# Altium PCB PCB.PcbDoc
Units mm, origin at the board's own origin, x right, y up, seen from the top; angles counter-clockwise.
Board outline 50 x 31 mm, 2 copper layers (Top Layer, Bottom Layer); 56 components, 45 nets, 245 pads, 26 vias.
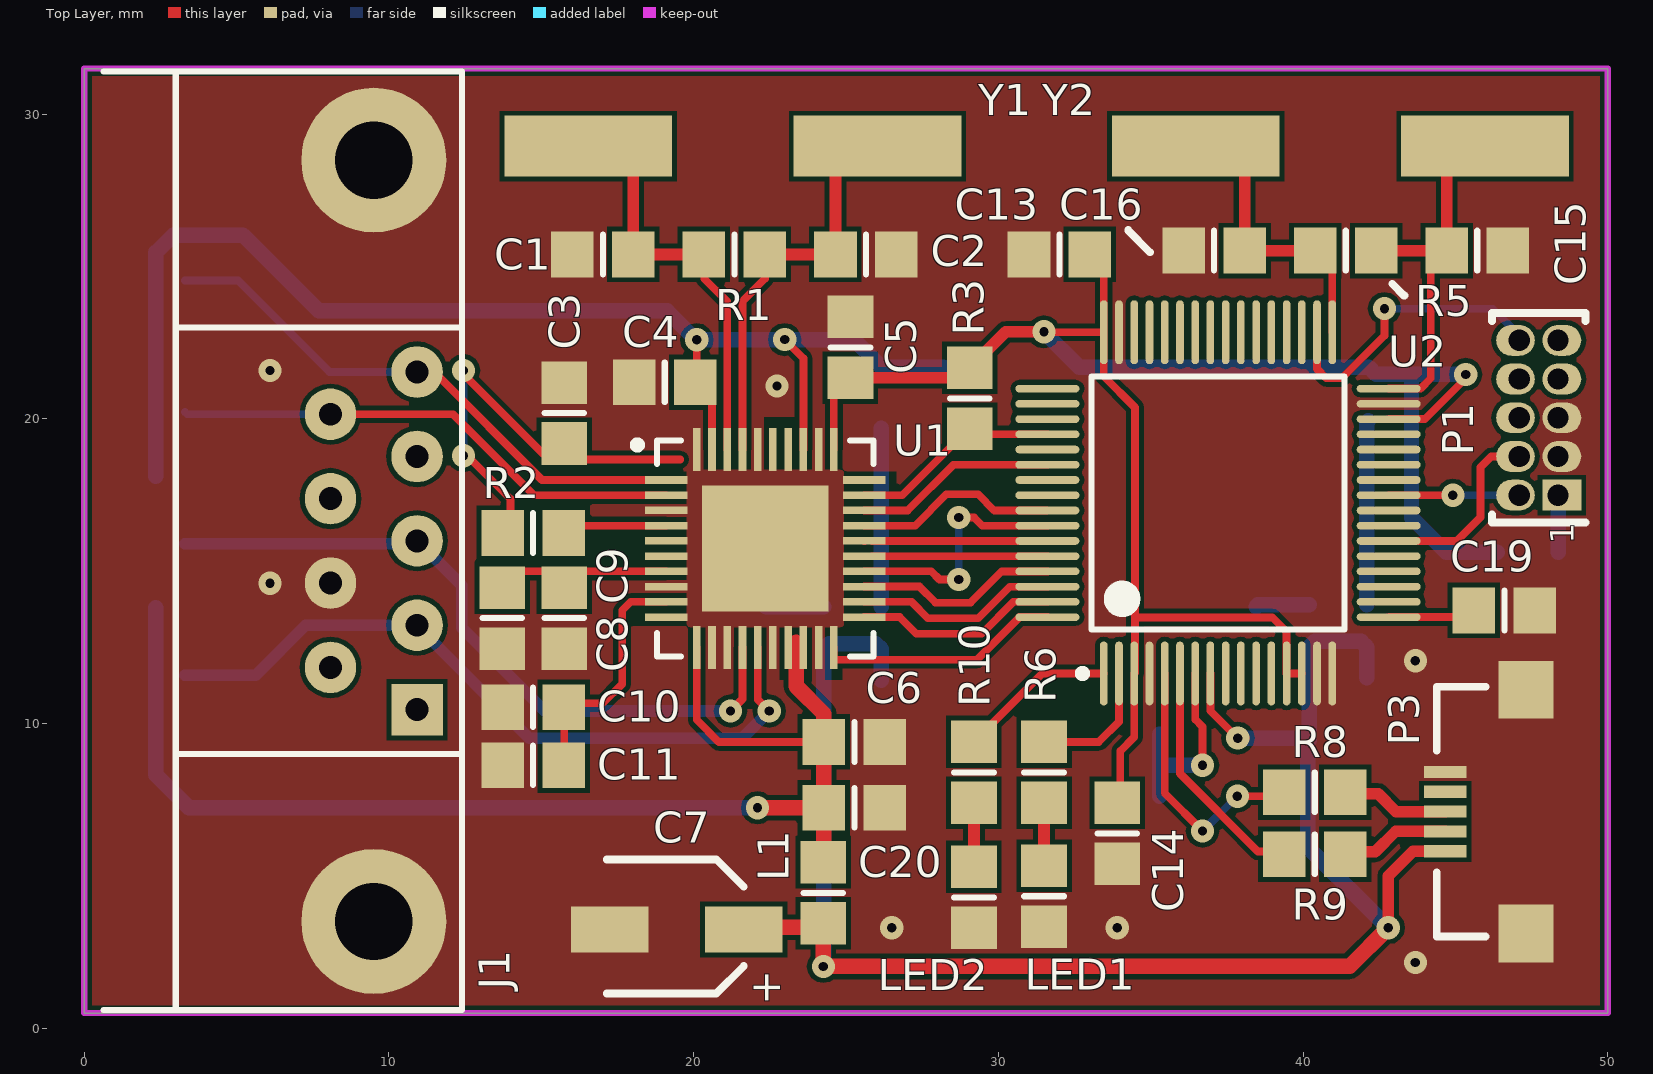
[diagram p0: Top Layer view]
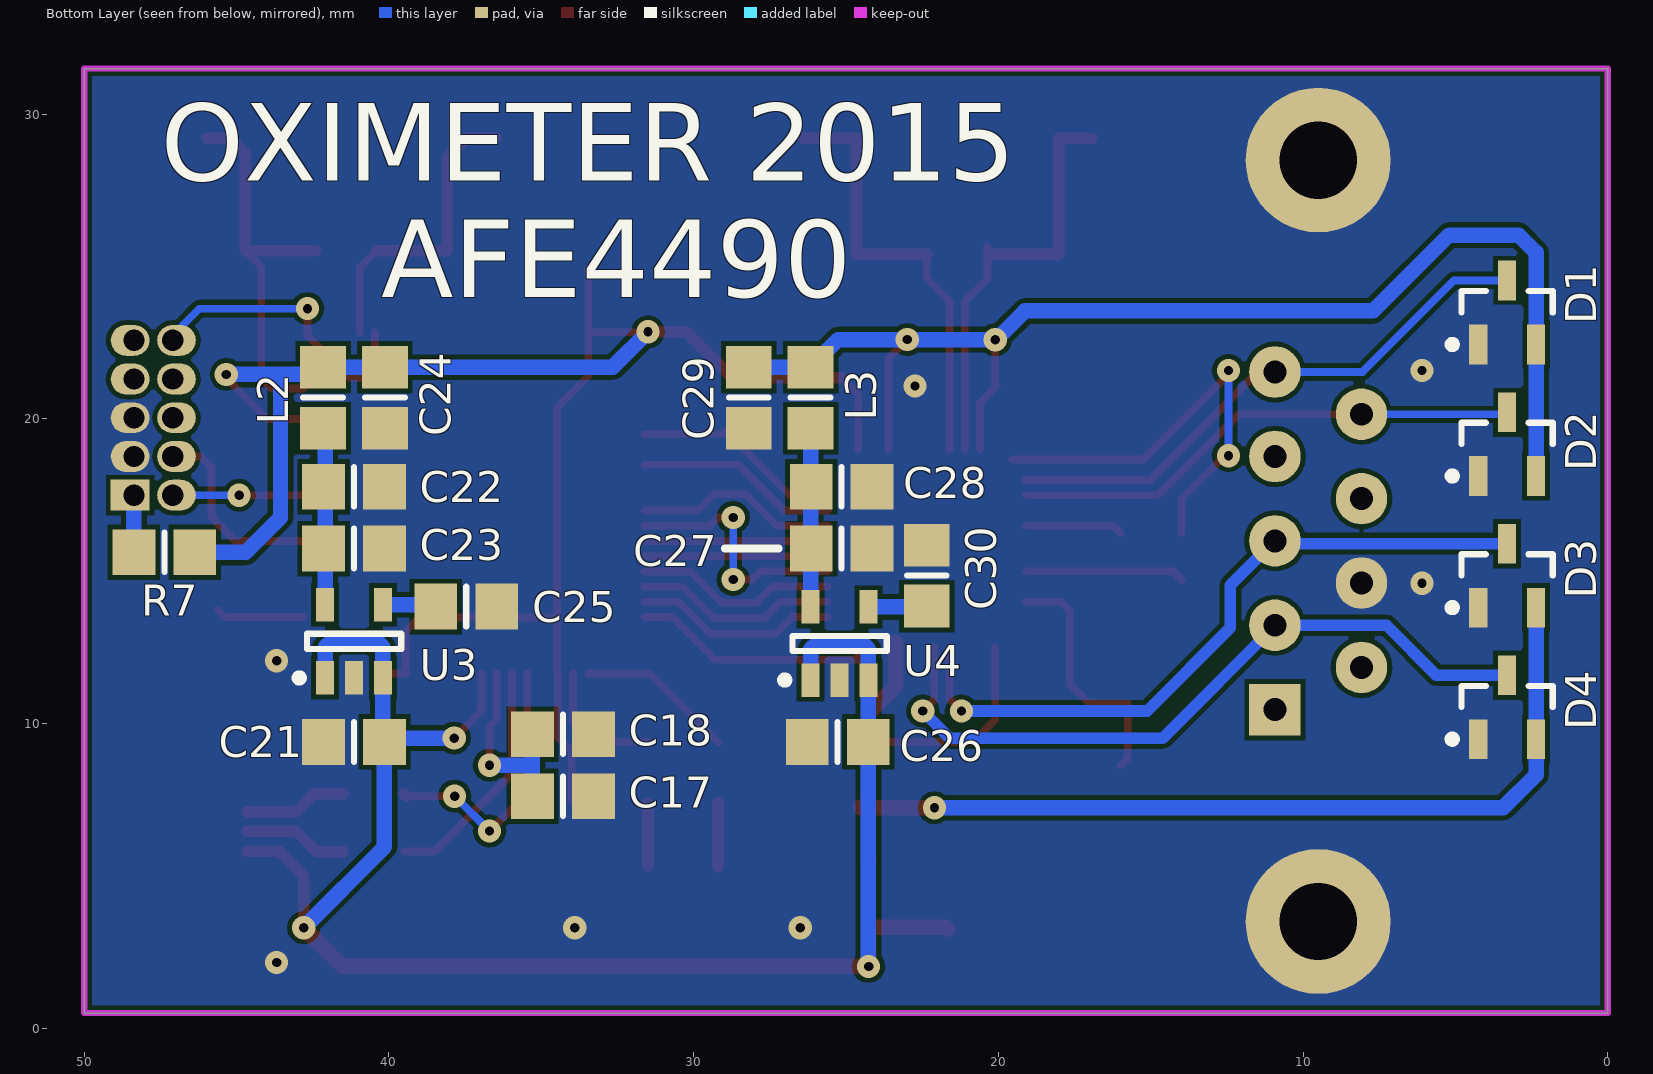
[diagram p1: Bottom Layer view, seen from below]

## Layer stack, top to bottom
Top Solder: solder mask 0.0102, Solder Resist, Dk 3.5
Top Layer: signal copper 0.0356
Dielectric 1: dielectric 0.32, FR-4, Dk 4.8
Bottom Layer: signal copper 0.0356
Bottom Solder: solder mask 0.0102, Solder Resist, Dk 3.5

## Board outline
0,0.5 50,0.5 50,31.5 0,31.5

## Design rules (kind name [scope] priority, off if disabled: settings)
AssemblyTestPointUsage SilkToBoardRegionClearance [All] p2:
Clearance [All] p1: gap=0.152
DiffPairsRouting [All] p1: maxlimit=0.254 minlimit=0.254 mostfreqgap=0.254 toplayer_minwidth=0.152 toplayer_maxwidth=0.381 toplayer_prefwidth=0.254 bottomlayer_minwidth=0.152 bottomlayer_maxwidth=0.381 bottomlayer_prefwidth=0.254 maxuncoupledlength=12.7
MatchedLengths DiffPair_DIFF100MatchedLengths [InDifferentialPairClass('DIFF100')] p1: tolerance=0.152 checknetsindiffpair=TRUE checkdiffpairvsdiffpair=FALSE checkothers=FALSE
MinimumSolderMaskSliver SilkscreenOverComponentPads_1 [All] p2: minsoldermaskwidth=0.254
MinimumSolderMaskSliver SilkToSolderMaskClearance [IsPad] p3: minsoldermaskwidth=0.254
MinimumSolderMaskSliver SilkscreenOverComponentPads [All] p4: minsoldermaskwidth=0.254
PolygonConnect [All] p1: connectstyle=Direct reliefconductorwidth=0.254 reliefentries=4 polygonreliefangle="90 Angle" airgapwidth=0.254
RoutingVias [All] p1: holewidth=0.305 width=0.635 viastyle="Through Hole" minholewidth=0.305 minwidth=0.635 maxholewidth=0.711 maxwidth=1.27
SilkToBoardRegionClearance SilkToBoardRegionClearance_1 [All] p1:
SilkToSolderMaskClearance SilkToSolderMaskClearance_1 [IsPad] p1: minsilkscreentomaskgap=0.254 clearancetoexposedcopper=TRUE
SolderMaskExpansion [All] p1: expansion=0.102
UnpouredPolygon [All] p1: allowunpoured=FALSE
Width [All] p1: maxlimit=2.54 minlimit=0.152 preferedwidth=0.254
26 further rules are at their usual default settings.

## Classes and differential pairs
component class Power_module: C20 C21 C22 C23 C24 C25 C26 C27 C28 C29 C30 L1 L2 L3 U3 U4
component class Main: C7 P3
component class Control_module: C13 C14 C15 C16 C17 C18 C19 LED1 LED2 P1 R5 R6 R7 R8 R9 R10 U2 Y2
component class Acquisition_module: C1 C2 C3 C4 C5 C6 C8 C9 C10 C11 D1 D2 D3 D4 J1 R1 R2 R3 U1 Y1
differential pair TX: +TX_P -TX_N
differential pair IN: +IN_P -IN_N
differential pair USB_C: +USB_C_P -USB_C_N

## Components (designator, comment, footprint, x,y, rotation, side; value= is the part's Value field where it differs from the comment)
C1 "Cap" 6-0805_M 17.018,25.4 r0 top
C2 "Cap" 6-0805_M 25.654,25.4 r180 top
C3 "Cap" 6-0805_M 15.748,20.193 r270 top
C4 "Cap" 6-0805_M 19.05,21.209 r0 top
C5 "Cap" 6-0805_M 25.146,22.352 r270 top
C6 "Cap" 6-0805_M 25.273,9.398 r180 top
C7 "Cap Pol1" "CAP SMD 4mm" 17.145,1.143 r270 top
C8 "Cap" 6-0805_M 15.748,13.462 r90 top
C9 "Cap" 6-0805_M 13.716,13.462 r90 top
C10 "Cap" 6-0805_M 14.732,10.541 r0 top
C11 "Cap" 6-0805_M 14.732,8.636 r0 top
C13 "Cap" 6-0805_M 32.004,25.4 r180 top
C14 "Cap" 6-0805_M 33.9,6.4 r270 top
C15 "Cap" 6-0805_M 45.72,25.527 r180 top
C16 "Cap" 6-0805_M 37.084,25.527 r0 top
C17 "Cap" 6-0805_M 34.29,7.62 r0 bottom
C18 "Cap" 6-0805_M 34.29,9.652 r0 bottom
C19 "Cap" 6-0805_M 46.609,13.716 r180 top
C20 "Cap" 6-0805_M 25.273,7.239 r180 top
C21 "Cap" 6-0805_M 41.148,9.398 r180 bottom
C22 "Cap" 6-0805_M 41.148,17.78 r0 bottom
C23 "Cap" 6-0805_M 41.148,15.748 r0 bottom
C24 "Cap" 6-0805_M 40.132,20.701 r90 bottom
C25 "Cap" 6-0805_M 37.465,13.843 r0 bottom
C26 "Cap" 6-0805_M 25.273,9.398 r180 bottom
C27 "Cap" 6-0805_M 25.146,15.748 r0 bottom
C28 "Cap" 6-0805_M 25.146,17.78 r0 bottom
C29 "Cap" 6-0805_M 28.194,20.701 r90 bottom
C30 "Cap" 6-0805_M 22.352,14.859 r270 bottom
D1 "BAT54S" SOT23_N 3.302,23.495 r90 bottom
D2 "BAT54S" SOT23_N 3.302,19.177 r90 bottom
D3 "BAT54S" SOT23_N 3.302,14.859 r90 bottom
D4 "BAT54S" SOT23_N 3.302,10.541 r90 bottom
J1 "DB9" DB9 0,16 r90 top
L1 "Inductor" 6-0805_M 24.257,4.445 r90 top
L2 "Inductor" 6-0805_M 42.164,20.701 r90 bottom
L3 "Inductor" 6-0805_M 26.162,20.701 r90 bottom
LED1 "LED0" 6-0805_M 31.5,4.336 r270 top
LED2 "LED0" 6-0805_M 29.2,4.3 r270 top
P1 "MHDR2X5" MHDR2X5 48.371,17.5 r90 top
P3 "USB Header" MicroUSB-B 46.99,7.112 r90 top
R1 "Res1" 6-0805_M 21.336,25.4 r0 top
R2 "Res1" 6-0805_M 14.732,16.256 r0 top
R3 "Res1" 6-0805_M 29.058,20.676 r90 top
R5 "Res1" 6-0805_M 41.402,25.527 r180 top
R6 "Res1" 6-0805_M 31.5,8.4 r270 top
R7 "Res1" 6-0805_M 47.371,15.621 r0 bottom
R8 "Res1" 6-0805_M 40.386,7.747 r180 top
R9 "Res1" 6-0805_M 40.386,5.715 r180 top
R10 "Res1" 6-0805_M 29.2,8.4 r270 top
U1 "AFE4490" AFE4490QFN50P680X680X100_HS-41N 22.352,15.748 r0 top
U2 "MK22FN512" MK22FN512_TSQFP50P1200X1200X160-64N 37.211,17.247 r90 top
U3 "TPS73233" TI-DBV5_N 41.148,12.7 r90 bottom
U4 "TPS73233" TI-DBV5_N 25.212,12.63 r90 bottom
Y1 "8MHz" "Crystal SMD" 26.035,28.956 r180 top
Y2 "8MHz" "Crystal SMD" 45.974,28.956 r180 top

## Footprints (in the part's own frame and the unit in brackets; to place one, negate y for a bottom-side part, rotate by r counter-clockwise, add the part's x,y. Pads: shape width x height; smd on the part's side, far side on the other; paste and mask are expansions set on the pad)
6-0805_M [mm] "Chip Resistor, Body 2.0x1.2mm, IPC Low Density"
  rect 1.4x1.5 smd: 1(-1,0) 2(1,0)
  silkscreen extent 0,-0.65 0,0.65, body extent -1.07,-0.7 1.07,0.7, height 0.7
AFE4490QFN50P680X680X100_HS-41N [mm] "Integrated Analog Front-End for Pulse Oximeters AFE4490 Footprint"
  rect 1.4x0.25 smd: 1(-3.25,2.25) 2(-3.25,1.75) 3(-3.25,1.25) 4(-3.25,0.75) 5(-3.25,0.25) 6(-3.25,-0.25) 7(-3.25,-0.75) 8(-3.25,-1.25) 9(-3.25,-1.75) 10(-3.25,-2.25) 21(3.25,-2.25) 22(3.25,-1.75) 23(3.25,-1.25) 24(3.25,-0.75) 25(3.25,-0.25) 26(3.25,0.25) 27(3.25,0.75) 28(3.25,1.25) 29(3.25,1.75) 30(3.25,2.25)
  rect 0.25x1.4 smd: 11(-2.25,-3.25) 12(-1.75,-3.25) 13(-1.25,-3.25) 14(-0.75,-3.25) 15(-0.25,-3.25) 16(0.25,-3.25) 17(0.75,-3.25) 18(1.25,-3.25) 19(1.75,-3.25) 20(2.25,-3.25) 31(2.25,3.25) 32(1.75,3.25) 33(1.25,3.25) 34(0.75,3.25) 35(0.25,3.25) 36(-0.25,3.25) 37(-0.75,3.25) 38(-1.25,3.25) 39(-1.75,3.25) 40(-2.25,3.25)
  rect 4.15x4.15 smd: 41(0,0)
  silkscreen extent -4.32,-3.55 3.55,3.55, body extent -3.4,-3.4 3.4,3.4, height 1
"CAP SMD 4mm" [mm]
  rect 1.524x2.54 smd: 1(-2.1,4.5) 2(-2.1,0.1)
  silkscreen extent -4.4,0 0,4.5, body extent -4.35,-0.04 -0.05,4.56, height 3.91
"Crystal SMD" [mm]
  rect 5.5x2 smd: 1(0,0) 2(9.5,0)
  body extent -1.65,-2.41 11.15,2.41, height 4.3
DB9 [mm] "DB9 Connector"
  rect 1.69x1.69 hole 0.75: 1(-5.54,-10.92)
  round 1.69 hole 0.75: 2(-2.77,-10.92) 3(0,-10.92) 4(2.77,-10.92) 5(5.54,-10.92) 6(-4.155,-8.08) 7(-1.385,-8.08) 8(1.385,-8.08) 9(4.155,-8.08)
  round 4.76 hole 2.54: 10(-12.495,-9.5) 11(12.495,-9.5)
  silkscreen extent -15.4,-12.4 15.4,-0.63, body extent -15.4,-13.21 15.4,5.99, height 12.5
MHDR2X5 [mm] "Connector; Header; 5x2 Position"
  rect 1.016x1.27 hole 0.7 copper offset 0,-0.127: 1(0,0)
  oval 1.016x1.27 hole 0.7 copper offset 0,0.127: 2(0,1.27) 4(1.27,1.27) 6(2.54,1.27) 8(3.81,1.27) 10(5.08,1.27)
  oval 1.016x1.27 hole 0.7 copper offset 0,-0.127: 3(1.27,0) 5(2.54,0) 7(3.81,0) 9(5.08,0)
MicroUSB-B [mm] "Micro USB SMD Connector"
  rect 0.4x1.4 smd: D+(0,2.325) D-(-0.65,2.325) GND(1.3,2.325) ID(0.65,2.325) VCC(-1.3,2.325)
  rect 1.9x1.8 smd: M(-4,-0.325) M(4,-0.325)
  silkscreen extent -4.1,1 4.1,2.6, body extent -3.99,-2.87 3.99,2.55, height 2.63
MK22FN512_TSQFP50P1200X1200X160-64N [mm] "120 MHz Cortex-M4 Based Microcontroller with FPU"
  oval 2.1x0.25 smd: 1(-5.6,3.75) 2(-5.6,3.25) 3(-5.6,2.75) 4(-5.6,2.25) 5(-5.6,1.75) 6(-5.6,1.25) 7(-5.6,0.75) 8(-5.6,0.25) 9(-5.6,-0.25) 10(-5.6,-0.75) 11(-5.6,-1.25) 12(-5.6,-1.75) 13(-5.6,-2.25) 14(-5.6,-2.75) 15(-5.6,-3.25) 16(-5.6,-3.75) 33(5.6,-3.75) 34(5.6,-3.25) 35(5.6,-2.75) 36(5.6,-2.25) 37(5.6,-1.75) 38(5.6,-1.25) 39(5.6,-0.75) 40(5.6,-0.25) 41(5.6,0.25) 42(5.6,0.75) 43(5.6,1.25) 44(5.6,1.75) 45(5.6,2.25) 46(5.6,2.75) 47(5.6,3.25) 48(5.6,3.75)
  oval 0.25x2.1 smd: 17(-3.75,-5.6) 18(-3.25,-5.6) 19(-2.75,-5.6) 20(-2.25,-5.6) 21(-1.75,-5.6) 22(-1.25,-5.6) 23(-0.75,-5.6) 24(-0.25,-5.6) 25(0.25,-5.6) 26(0.75,-5.6) 27(1.25,-5.6) 28(1.75,-5.6) 29(2.25,-5.6) 30(2.75,-5.6) 31(3.25,-5.6) 32(3.75,-5.6) 49(3.75,5.6) 50(3.25,5.6) 51(2.75,5.6) 52(2.25,5.6) 53(1.75,5.6) 54(1.25,5.6) 55(0.75,5.6) 56(0.25,5.6) 57(-0.25,5.6) 58(-0.75,5.6) 59(-1.25,5.6) 60(-1.75,5.6) 61(-2.25,5.6) 62(-2.75,5.6) 63(-3.25,5.6) 64(-3.75,5.6)
  silkscreen extent -5.72,-4.15 4.15,4.57, body extent -5,-5 5,5, height 1.2
SOT23_N [mm] "SOT23, 3-Leads, Body 2.9x1.3mm, Pitch 0.95mm, Lead Span 2.3mm, IPC Medium Density"
  rect 1.3x0.6 smd: 1(-1.05,0.95) 2(-1.05,-0.95) 3(1.05,0)
  silkscreen extent -1.17,-1.5 0.7,1.93, body extent -0.7,-1.5 0.7,1.5, height 1.1
TI-DBV5_N [mm] "SOT23, 5-Leads, Body 2.9x1.6mm, Pitch 0.95mm, IPC Medium Density"
  rect 1.1x0.6 smd: 1(-1.2,0.95) 2(-1.2,0) 3(-1.2,-0.95) 4(1.2,-0.95) 5(1.2,0.95)
  silkscreen extent -1.32,-1.55 0.25,1.93, body extent -0.87,-1.52 0.87,1.53, height 1.45

## Part data
C1 C2 C3 C4 C5 C6 C8 C9 C10 C11 C13 C14 C15 C16 C17 C18 C19 C20 C21 C22 C23 C24 C25 C26 C27 C28 C29 C30: "Capacitor"
C7: "Polarized Capacitor (Radial)"
D1 D2 D3 D4: "Schottky Barrier Double Diode"
J1: library part "D Connector 9", "Receptacle Assembly, 9 Position, Right Angle"
LED1 LED2: "Typical INFRARED GaAs LED"
P1: "Header, 5-Pin, Dual row"
P3: library part "USB 7 pin Header"
R1 R2 R3 R5 R6 R7 R8 R9 R10: "Resistor"
U1: "Integrated Analog Front-End for Pulse Oximeters"
U2: "120 MHz Cortex-M4 Based Microcontroller with FPU"
U3 U4: library part TPS73233DBVT, "Single Output Fast Transient Response LDO, 200 mA, Fixed 3.3 V Output, 1.7 to 5.5 V Input, with Reverse Current Protection, 5-pin SOT-23 (DBV), -40 to 85 degC, Green (RoHS & no Sb/Br)"
Y1 Y2: library part XTAL, "Crystal Oscillator"

## Via types
v1: diameter 0.762, hole 0.305, Top Layer to Bottom Layer, 26 vias

## Nets (pads, with @x,y where several pads share a name; then routed paths per layer and width w, separated by ;. In a path a pad name is that pad's centre, name@x,y a point inside that pad or via, vN(x,y) a via of type N, cw(c..) or ccw(c..) an arc to the next point about the centre after c; other vN are vias at no path point)
AFE_BG: C8.2 C9.2 U1.7 | length 5.2
  Top Layer w0.254: C9.2@13.97,14.716 14.252,14.998 14.633,14.998 U1.7
AFE_PDN: U1.20 U2.64 | length 8
  Top Layer w0.254: U1.20 24.602,12.1 29.3,12.1 30.697,13.497 U2.64
AFE_TX_REF: C10.2 C11.2 U1.9 | length 8.3
  Top Layer w0.254: C11.2@15.986,8.636 15.748,8.874 15.748,10.668 17.018,10.668 17.653,11.303 17.653,13.716 17.935,13.998 U1.9
AVDD: C4.2 C29.2 D1.2 D2.2 L3.2 U1.33 U1.39 | length 42.9
  Top Layer w0.254: v1(20.1,22.6) 20.1,21.132 20.05,21.082 20.602,20.53 U1.39 ; v1(22.987,22.606) 23.602,21.991 U1.33
  Bottom Layer w0.508: D2.2 D1.2 2.352,25.466 2.921,26.035 5.207,26.035 7.696,23.546 19.126,23.546 20.066,22.606 v1(22.987,22.606) 25.257,22.606 L3.2 C29.2
DVDD: C5.2 C13.1 C14.1 C24.2 L2.2 R3.2 R7.1 U1.31 U2.3 U2.13 U2.14 U2.30 U2.48 | length 63
  Top Layer w0.254: U1.31 24.602,20.808 C5.2 ; v1(31.496,22.86) 31.509,22.847 U2.48 ; C13.1 33.461,24.943 U2.48 ; C14.1 34,7.5 34,9.1 34.461,9.561 U2.3 34.486,11.672 34.486,13.462 ; U2.14 U2.13 39.461,13.015 38.989,13.487 34.486,13.487 34.486,20.378 33.461,21.403 U2.48 ; U2.30 44,19.997 45.339,21.336 v1(45.339,21.463)
  Top Layer w0.381: C5.2 28.734,21.352 R3.2 30.242,22.86 v1(31.496,22.86)
  Bottom Layer w0.508: v1(31.496,22.86) 32.655,21.701 40.005,21.701 L2.2 42.402,21.463 43.561,21.463 ; v1(45.339,21.463) 43.561,21.463 ; R7.1 44.704,15.621 43.561,16.764 43.561,21.463
GND: C1.1 C2.1 C3.1 C4.1 C5.1 C6.1 C7.2 C8.1 C9.1 C10.1 C11.1 C13.2 C14.2 C15.1 C16.1 C17.1 C18.1 C19.1 C20.1 C21.1 C22.1 C23.1 C24.1 C25.1 C26.1 C27.1 C28.1 C29.1 C30.1 D1.1 D2.1 D3.1 D4.1 J1.7 J1.10 J1.11 LED1.2 LED2.2 P1.3 P1.5 P3.GND P3.M U1.3 U1.8 U1.12 U1.13 U1.16 U1.19 U1.32 U1.36 U1.40 U1.41 U2.4 U2.15 U2.16 U2.31 U2.47 U3.2 U4.2 | length 0.3
  Bottom Layer w0.508: C26.1 C26.1@26.273,9.693
  other v1: 43.688,2.159 26.5,3.3 33.9,3.3 43.688,12.065 6.096,14.605 22.733,21.082 6.096,21.59
IN_N: D1.3 J1.5 U1.1 | length 18.5
  Top Layer w0.254: J1.5 11.48,21.54 15.022,17.998 U1.1
  Bottom Layer w0.254: D1.3 5.046,24.545 8.051,21.54 J1.5
IN_P: D2.3 J1.9 U1.2 | length 16.9
  Top Layer w0.254: J1.9 12.102,20.155 12.216,20.041 12.217,20.041 14.76,17.498 U1.2
  Bottom Layer w0.254: D2.3 3.374,20.155 J1.9
K22_AFE_RDY: U1.28 U2.54 | length 6.6
  Top Layer w0.254: U1.28 27.031,16.998 28.53,18.497 U2.54
K22_AFE_RESETZ: R3.1 U1.29 U2.52 | length 6.7
  Top Layer w0.254: U1.29 26.845,17.498 R3.1@28.829,19.482 ; R3.1@28.956,19.574 29.033,19.497 U2.52
K22_DIAG_END: U1.21 U2.63 | length 6.7
  Top Layer w0.254: U1.21 26.761,13.498 27.305,12.954 29.454,12.954 30.497,13.997 U2.63
K22_LED_ALM: U1.22 U2.62 | length 6.7
  Top Layer w0.254: U1.22 27.15,13.998 27.686,13.462 29.337,13.462 30.372,14.497 U2.62
K22_PD_ALM: U1.23 U2.61 | length 6.7
  Top Layer w0.254: U1.23 27.412,14.498 27.94,13.97 29.083,13.97 30.11,14.997 U2.61
K22_SPI_CE: U1.27 U2.57 | length 6.6
  Top Layer w0.254: U1.27 27.268,16.498 28.296,17.526 29.337,17.526 29.87,16.993 U2.57@31.582,16.993
K22_SPI_CLK: U1.24 U2.58 | length 8.3
  Top Layer w0.254: U1.24 27.801,14.998 28.067,14.732 v1(28.702,14.732) v1@28.69,14.744 ; v1(28.702,16.764) 29.21,16.764 29.477,16.497 U2.58
  Bottom Layer w0.254: v1(28.702,14.732) v1(28.702,16.764)
K22_SPI_MISO: U1.25 U2.60 | length 5.8
  Top Layer w0.254: U1.25@25.856,15.498 31.61,15.498 U2.60
K22_SPI_MOSI: U1.26 U2.59 | length 5.8
  Top Layer w0.254: U1.26 U1.26@25.603,15.997 ; U1.26@25.857,15.997 U2.59
LVDD: C6.2 C20.2 D3.2 D4.2 L1.2 U1.11 U1.17 U1.18 | length 42.4
  Top Layer w0.254: U1.11 20.102,10.124 20.828,9.398 24.019,9.398 C6.2@24.273,9.144
  Top Layer w0.508: v1(22.098,7.239) C20.2 ; 23.368,12.675 23.368,11.227 24.273,10.322 C20.2 ; L1.2 24.273,5.461 C20.2 ; C20.2@24.511,7.239 C20.2@24.527,7.255
  Bottom Layer w0.508: D3.2 D4.2 2.352,8.316 3.429,7.239 v1(22.098,7.239)
NetC1_2: C1.2 R1.1 U1.38 Y1.2 | length 14.2
  Top Layer w0.254: R1.1@20.352,25.654 20.352,24.606 21.102,23.856 U1.38
  Top Layer w0.381: Y1.2@16.932,29.21 18.018,29.21 C1.2 R1.1
NetC2_2: C2.2 R1.2 U1.37 Y1.1 | length 14.6
  Top Layer w0.254: U1.37 21.602,23.864 22.352,24.614 R1.2@22.352,25.4
  Top Layer w0.381: R1.2 22.352,25.4 C2.2 24.654,29.21 Y1.1@26.432,29.21
NetC15_2: C15.2 R5.1 U2.32 Y2.1 | length 12.9
  Top Layer w0.254: U2.32 43.857,20.997 44.196,21.336 44.196,25.003 C15.2
  Top Layer w0.381: R5.1 C15.2 44.72,28.718 45.212,29.21 Y2.1@45.974,29.21
NetC16_2: C16.2 R5.2 U2.33 Y2.2 | length 10.2
  Top Layer w0.254: R5.2 40.961,24.968 U2.33
  Top Layer w0.381: Y2.2@36.474,29.21 37.465,29.21 38.084,28.591 C16.2 R5.2
NetC17_2: C17.2 C18.2 U2.7 | length 6.6
  Top Layer w0.254: U2.7 36.461,10.139 36.703,9.897 v1(36.703,8.636)
  Bottom Layer w0.508: C17.2 35.29,8.636 ; C18.2 35.29,8.636 ; v1(36.703,8.636) 35.29,8.636
NetC19_2: C19.2 U2.17 | length 2.9
  Top Layer w0.254: U2.17 45.39,13.497 C19.2
NetC22_2: C22.2 C23.2 L2.1 U3.5 | length 6.1
  Bottom Layer w0.508: U3.5 42.098,19.889 L2.1@42.148,19.939
NetC25_2: C25.2 U3.4 | length 1.8
  Bottom Layer w0.508: C25.2 38.522,13.9 U3.4
NetC27_2: C27.2 C28.2 L3.1 U4.5 | length 5.9
  Bottom Layer w0.508: U4.5 L3.1
NetC30_2: C30.2 U4.4 | length 1.9
  Bottom Layer w0.508: C30.2 22.381,13.83 U4.4
NetLED1_1: LED1.1 R6.2 | length 2.1
  Top Layer w0.381: LED1.1 R6.2
NetLED2_1: LED2.1 R10.2 | length 2.1
  Top Layer w0.381: LED2.1 R10.2
NetP1_1: P1.1 R7.2 | length 2
  Bottom Layer w0.508: R7.2 48.371,17.637 P1.1@48.387,17.653
NetR2_2: R2.2 U1.4 | length 3.2
  Top Layer w0.254: R2.2@15.986,16.256 16.228,16.498 U1.4
NetR6_1: R6.1 U2.2 | length 4.3
  Top Layer w0.254: R6.1 33.3,9.4 33.961,10.061 U2.2
NetR8_2: R8.2 U2.5 | length 9
  Top Layer w0.254: U2.5 35.461,7.719 v1(36.703,6.477) ; v1(37.846,7.62) R8.2@39.42,7.62
  Top Layer w0.381: R8.2@39.42,7.62 R8.2@39.5,7.7
  Bottom Layer w0.254: v1(36.703,6.477) v1(37.846,7.62)
NetR9_2: R9.2 U2.6 | length 7.9
  Top Layer w0.254: U2.6 35.961,8.362 38.523,5.8 R9.2@39.5,5.8
NetR10_1: R10.1 U2.1 | length 5.2
  Top Layer w0.254: R10.1 31.447,11.647 U2.1
SWD_CLK: P1.4 U2.22 | length 6.4
  Top Layer w0.254: U2.22 45.047,15.997 45.825,16.775 45.825,18.414 46.181,18.77 P1.4
SWD_DIO: P1.2 U2.25 | length 4.8
  Top Layer w0.254: U2.25 v1(44.919,17.497) ; v1(44.919,17.497) 45.017,17.399 45.085,17.467 45.056,17.497 v1(44.919,17.497)
  Bottom Layer w0.254: v1(44.919,17.497) 46.961,17.497 P1.2@47.117,17.653
SWD_RST: P1.10 U2.34 | length 9.8
  Top Layer w0.254: U2.34 40.461,21.642 40.767,21.336 41.275,21.336 42.672,22.733 v1(42.672,23.622)
  Bottom Layer w0.254: v1(42.672,23.622) 46.228,23.622 P1.10@47.117,22.733
TX_N: D3.3 J1.3 U1.14 | length 23.3
  Top Layer w0.254: v1(21.209,10.414) 21.602,10.807 U1.14
  Bottom Layer w0.381: D3.3 10.829,15.909 J1.3 10.924,16 12.383,14.541 12.383,13.144 15.113,10.414 v1(21.209,10.414)
TX_P: D4.3 J1.2 U1.15 | length 24
  Top Layer w0.254: U1.15 22.102,10.791 v1(22.479,10.414)
  Bottom Layer w0.381: D4.3 5.622,11.591 7.261,13.23 J1.2 10.92,13.21 14.605,9.525 21.59,9.525 v1(22.479,10.414)
USB_C_N: P3.D- R9.1 | length 3.4
  Top Layer w0.381: R9.1@41.5,5.8 42.376,5.8 43.038,6.462 P3.D-
USB_C_P: P3.D+ R8.1 | length 3.4
  Top Layer w0.381: R8.1@41.5,7.7 42.465,7.7 43.053,7.112 P3.D+
VBUS: C7.1 C21.2 C26.2 L1.1 P3.VCC U2.8 U3.1 U3.3 U4.1 U4.3 | length 59.1
  Top Layer w0.254: U2.8 36.961,10.423 v1(37.859,9.525) v1@38.125,9.525
  Top Layer w0.381: v1(42.799,3.302) 42.799,4.999 43.612,5.812 P3.VCC
  Top Layer w0.508: C7.1 21.72,3.318 L1.1@24.257,3.318 ; L1.1 L1.1@24.257,3.318 ; v1(42.799,3.302) 41.529,2.032 v1(24.257,2.032) L1.1@24.257,3.318
  Bottom Layer w0.508: v1@24.359,2.032 24.262,2.032 U4.3 24.262,12.442 24.45,12.63 25.974,12.63 26.162,12.442 U4.1 ; v1(37.859,9.525) 40.021,9.525 C21.2 ; U3.1 42.098,12.512 41.91,12.7 40.386,12.7 40.198,12.512 U3.3 40.198,9.448 C21.2 ; v1(42.799,3.302) 40.148,5.953 C21.2
VCM_SHIELD: C3.2 R2.1 | length 14.4
  Top Layer w0.254: v1(12.446,18.796) 12.573,18.796 13.986,17.383 R2.1@13.986,16.256 ; v1(12.446,21.59) 12.446,21.463 15.24,18.669 19.558,18.669
  Bottom Layer w0.254: v1(12.446,18.796) v1(12.446,21.59)
pads on no net: J1.1 J1.4 J1.6 J1.8 P1.6 P1.7 P1.8 P1.9 P3.ID U1.5 U1.6 U1.10 U1.30 U1.34 U1.35 U2.9 U2.10 U2.11 U2.12 U2.18 U2.19 U2.20 U2.21 U2.23 U2.24 U2.26 U2.27 U2.28 U2.29 U2.35 U2.36 U2.37 U2.38 U2.39 U2.40 U2.41 U2.42 U2.43 U2.44 U2.45 U2.46 U2.49 U2.50 U2.51 U2.53 U2.55 U2.56

## Polygon pours and split planes (outlines as drawn)
GND on Bottom Layer "Bottom Layer-No Net" (solid, remove dead copper, pour order 4): 0,32 50,32 50,0 0,0
GND on Top Layer "Bottom Layer-No Net" (solid, remove dead copper, pour order 3): 0,32 50,32 50,0 0,0

## Keep-outs
Keep-Out Layer:
  the board outline again, w0.203

## Silkscreen, mask and mechanical layers (free items; w line width, h text height)
Top Overlay:
  lines w0.254: 34.265,26.213 34.265,26.187 34.976,25.476 ; 42.926,24.435 43.307,24.054 43.332,24.054 ; 46.201,16.863 46.201,16.6 49.271,16.6 ; 46.201,23.217 46.201,23.48 49.271,23.48 49.271,23.217
Bottom Overlay:
  lines w0.254: 27.203,15.748 28.981,15.748
  text "OXIMETER 2015" at 47.498,27.813 h2.54
  text "AFE4490" at 40.259,24.003 h2.54

## Text inside footprints (layer, text, board x,y; h text height)
C7: Top Overlay "+" at 21.971,1.905 h1 r270
P1: Top Overlay "1" at 48.879,15.9 h0.76 r90
P3: Mechanical 18 "PCB EDGE" at 49.79,4.012 h1.02 r90